# Allegro board codec_board_gnd_update.brd
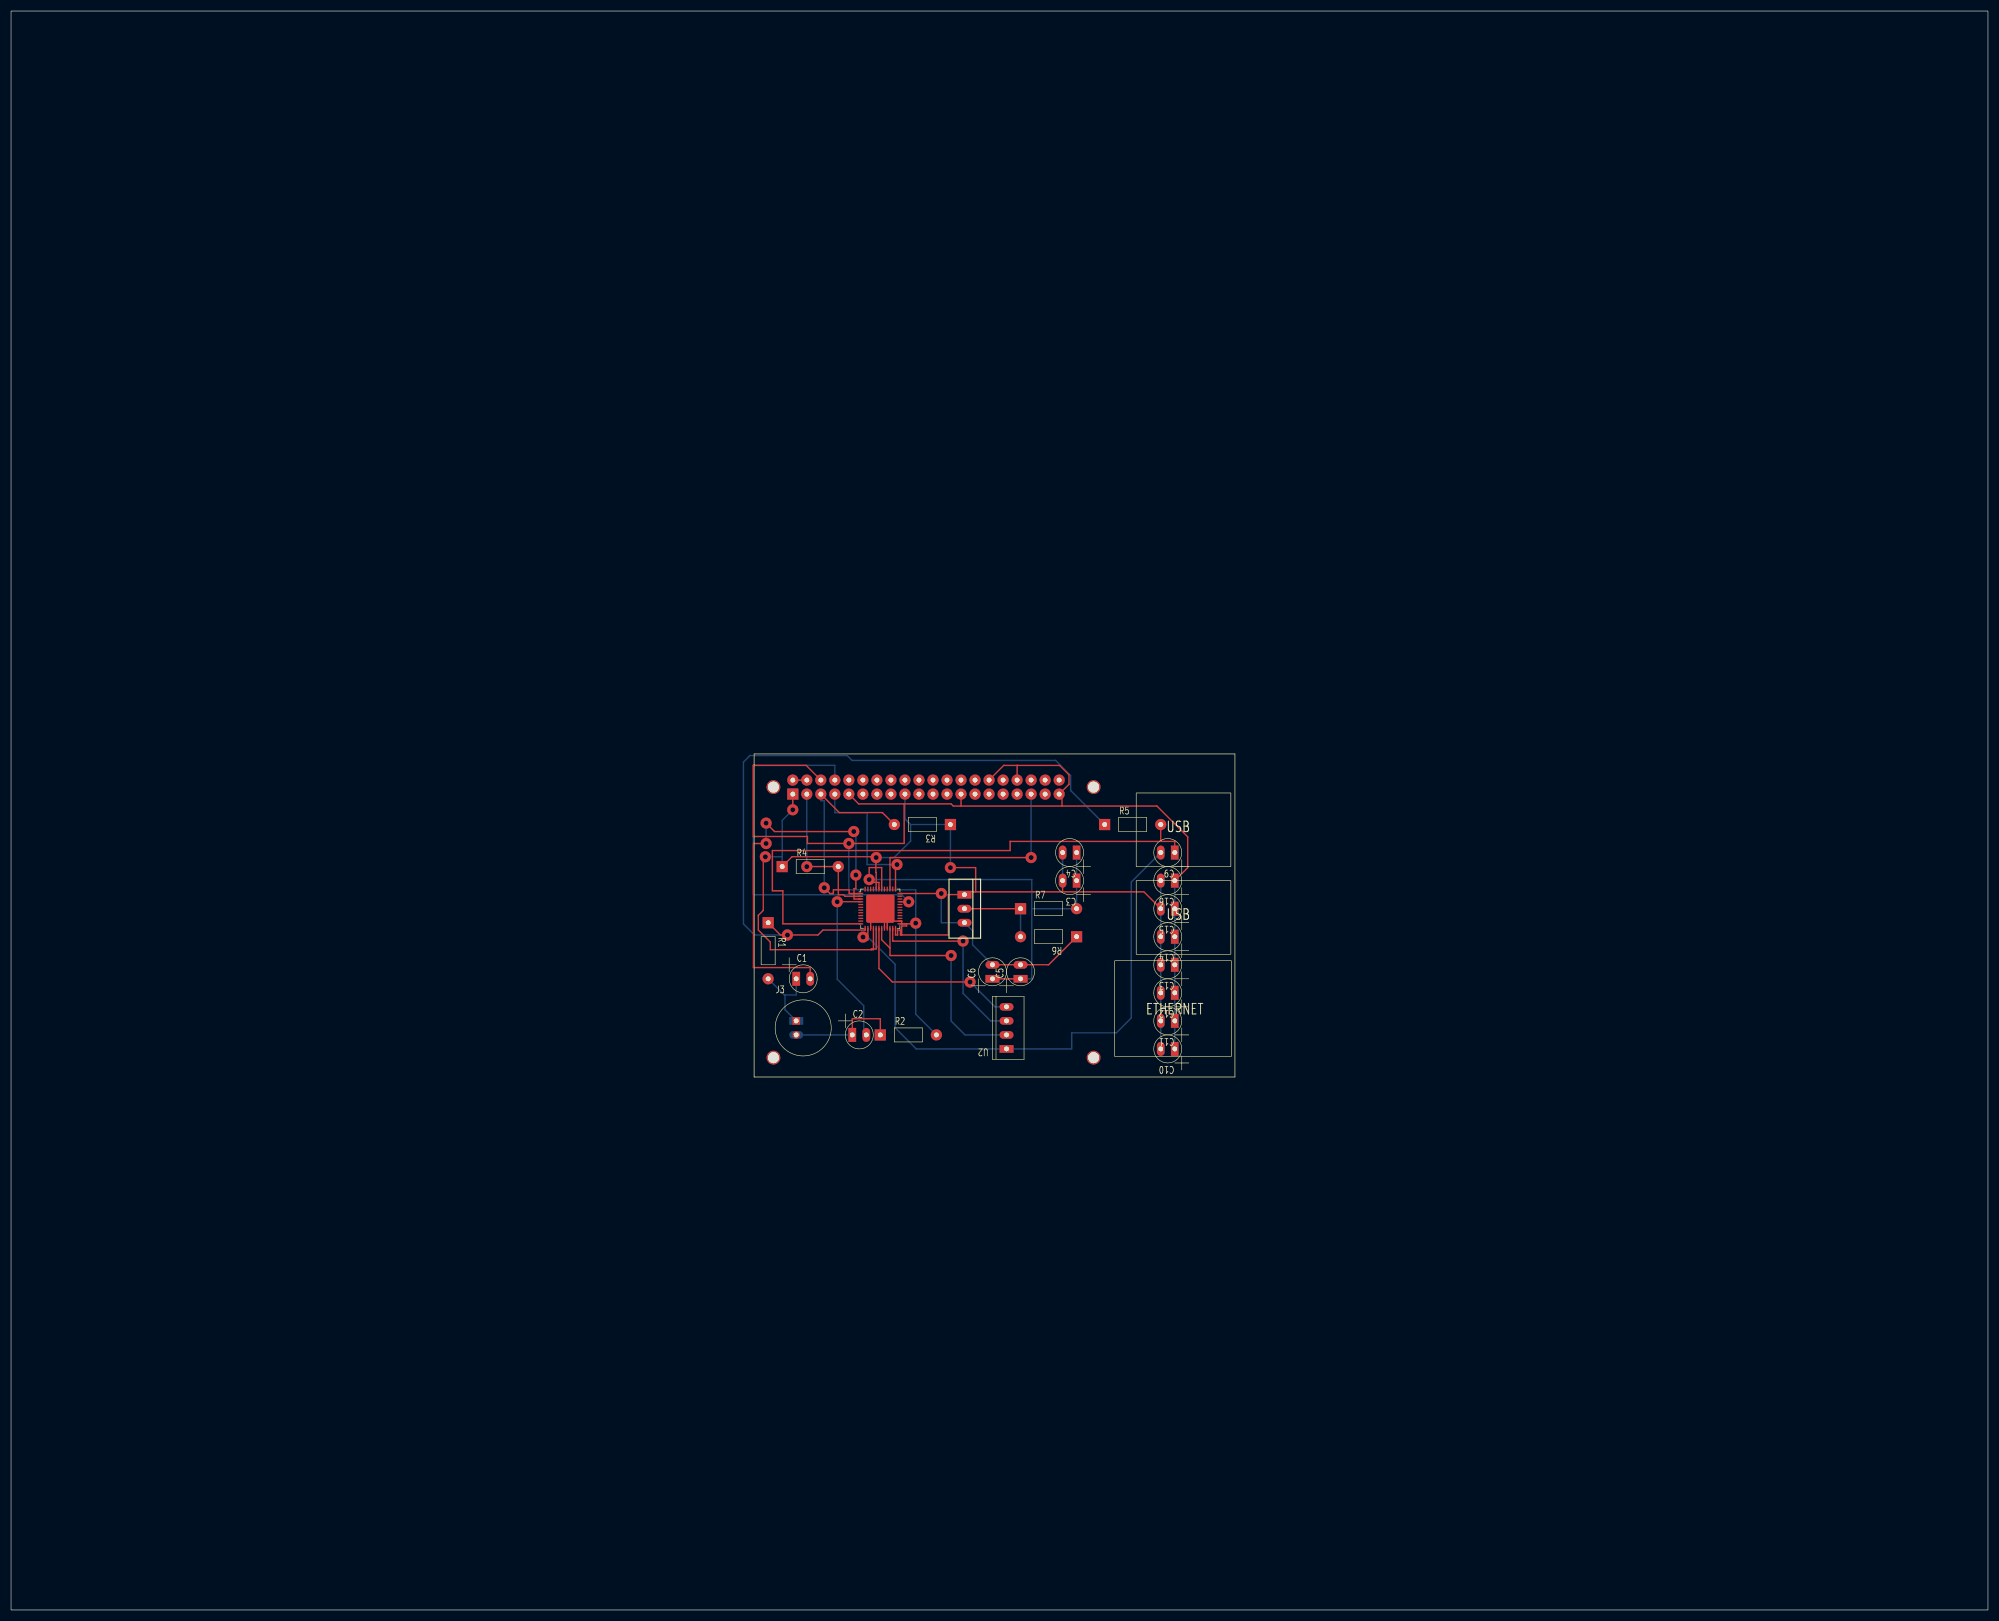
[diagram p0: board, top side]
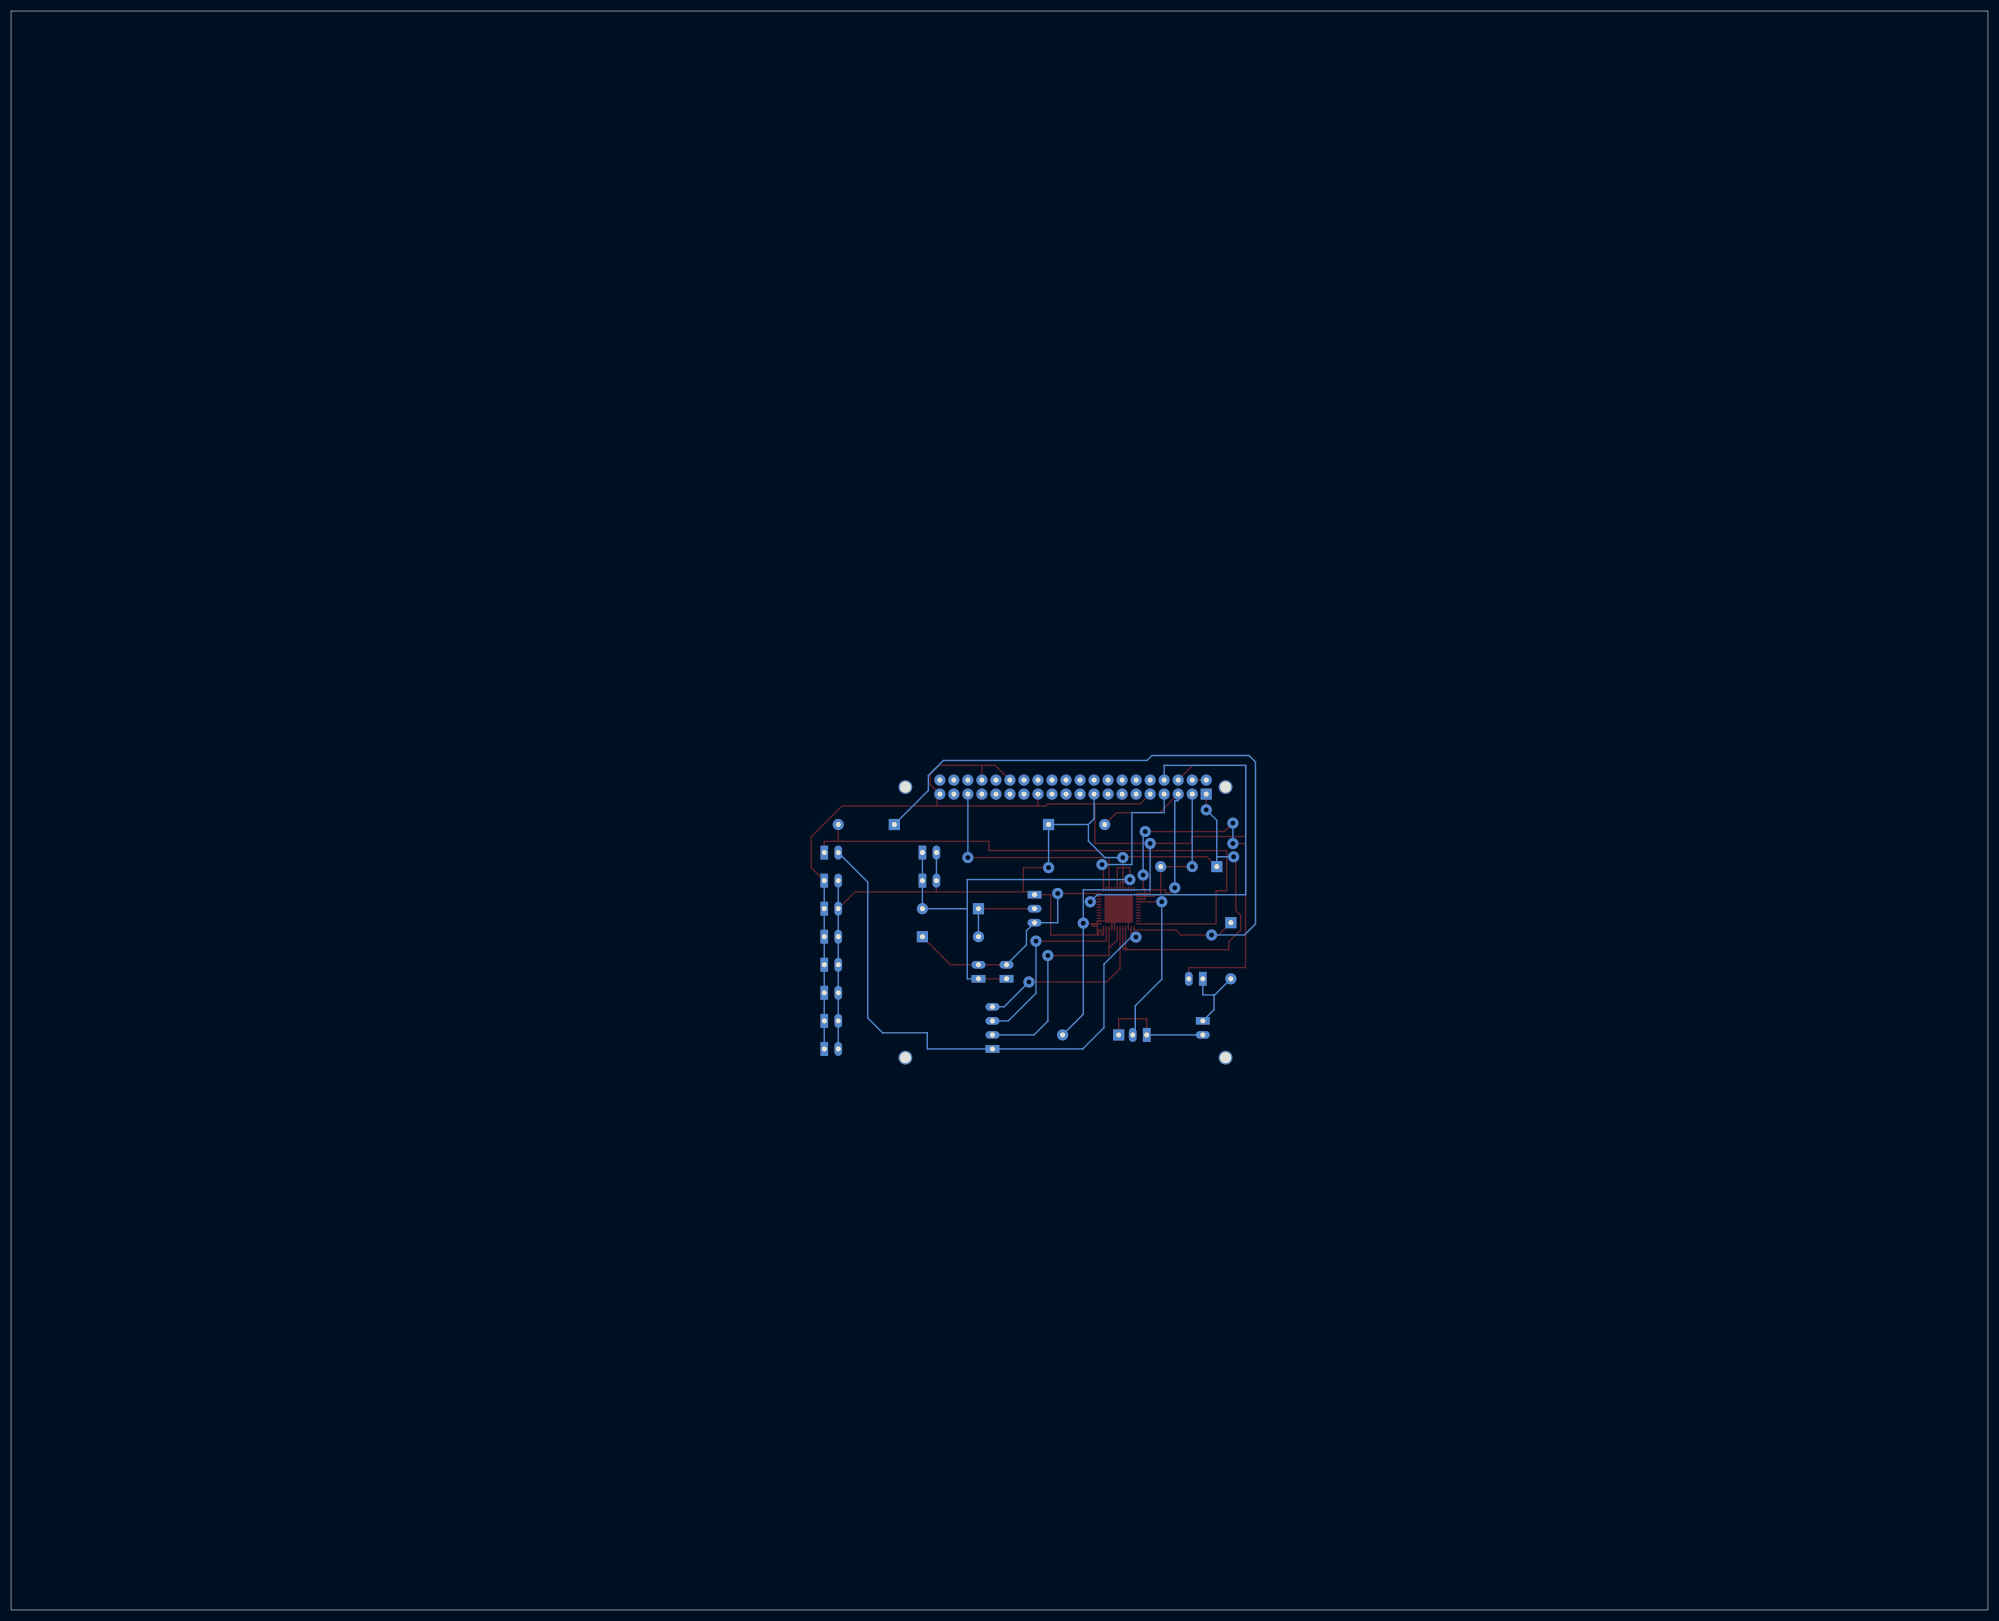
[diagram p1: board, bottom side, seen from below]

Outline 358.14 x 289.56 mm; copper layers: TOP, BOTTOM. Coordinates in mm from the lower left corner of the outline.
Outline path: rectangle 0,0 358.14,289.56

## Design rules (mm)
constraint set DEFAULT: min track width 0.254

## Placement (name value [footprint] x y rotation side)
C1  0.47uF  [GU-CAPCYL100]  142.24 114.3 0 top
C2  0.47uF  [GU-CAPCYL100]  152.4 104.14 0 top
C3  1uF  [GU-CAPCYL100]  193.04 132.08 180 top
C4  1uF  [GU-CAPCYL100]  193.04 137.16 180 top
C5  1uF  [GU-CAPCYL100]  182.88 114.3 90 top
C6  1uF  [GU-CAPCYL100]  177.8 114.3 90 top
C9  0.47uF  [GU-CAPCYL100]  210.82 137.16 180 top
C10  1uF  [GU-CAPCYL100]  210.82 101.6 180 top
C11  1uF  [GU-CAPCYL100]  210.82 106.68 180 top
C12  1uF  [GU-CAPCYL100]  210.82 111.76 180 top
C13  1uF  [GU-CAPCYL100]  210.82 116.84 180 top
C14  1uF  [GU-CAPCYL100]  210.82 121.92 180 top
C15  1uF  [GU-CAPCYL100]  210.82 127 180 top
C16  1uF  [GU-CAPCYL100]  210.82 132.08 180 top
J1  TLV320AIC33  [QFN49P50_700X700X100L40X24T515]  157.48 127 270 top
J3  Mic  [GU-MIC100]  142.24 106.68 0 top
R1  1k  [GU-RC400]  137.16 124.46 270 top
R2  1k  [GU-RC400]  157.48 104.14 0 top
R3  10k  [GU-RC400]  170.18 142.24 180 top
R4  10k  [GU-RC400]  139.7 134.62 0 top
R5  2k  [GU-RC400]  198.12 142.24 0 top
R6  1k  [GU-RC400]  193.04 121.92 180 top
R7  1k  [GU-RC400]  182.88 127 0 top
U1  Raspberry Pi B+  [GU-RASP-PI-3]  134.62 96.52 0 top
U2  Aux Out  [GU-MOLEX4]  180.34 101.6 180 top
U4  LM317_H  [GU-TO220AB]  172.72 129.54 270 top

## Library data of the parts
C1-C6 C9-C16 = CAP NP
J1 = CON50A_2
J3 = CON2
R1-R7 = RESISTOR
U1 = Raspberry Pi B+_0
U2 = 2MMCONN4
U4 = LM317_H

## Footprints (pads in the part's own frame, mm; a bottom-side part is the same pattern mirrored in y, then rotated)
GU-CAPCYL100
  rect 1.397x2.54 hole 0.889: 1(0,0)
  oval 1.397x2.54 hole 0.889: 2(2.54,0)
GU-MIC100
  rect 1.397x1.397 hole 0.889: 1(0,0)
  round 1.397 hole 0.889: 2(0,-2.54)
GU-MOLEX4
  rect 2.54x1.397 hole 0.889: 1(0,0)
  oval 2.54x1.397 hole 0.889: 2(0,-2.54) 3(0,-5.08) 4(0,-7.62)
GU-RASP-PI-3
  round 2.5 hole 2 unplated: (3.5,52.5) (3.5,3.5) (61.5,52.5) (61.5,3.5)
  rect 2.032x2.032 hole 0.889: 1(7,51.23)
  round 2.032 hole 0.889: 2(7,53.77) 3(9.54,51.23) 4(9.54,53.77) 5(12.08,51.23) 6(12.08,53.77) 7(14.62,51.23) 8(14.62,53.77) 9(17.16,51.23) 10(17.16,53.77) 11(19.7,51.23) 12(19.7,53.77) 13(22.24,51.23) 14(22.24,53.77) 15(24.78,51.23) 16(24.78,53.77) 17(27.32,51.23) 18(27.32,53.77) 19(29.86,51.23) 20(29.86,53.77) 21(32.4,51.23) 22(32.4,53.77) 23(34.94,51.23) 24(34.94,53.77) 25(37.48,51.23) 26(37.48,53.77) 27(40.02,51.23) 28(40.02,53.77) 29(42.56,51.23) 30(42.56,53.77) 31(45.1,51.23) 32(45.1,53.77) 33(47.64,51.23) 34(47.64,53.77) 35(50.18,51.23) 36(50.18,53.77) 37(52.72,51.23) 38(52.72,53.77) 39(55.26,51.23) 40(55.26,53.77)
GU-RC400
  rect 2.032x2.032 hole 0.889: 1(0,0)
  round 2.032 hole 0.889: 2(10.16,0)
GU-TO220AB
  rect 1.397x2.54 hole 0.889: 1(0,0)
  oval 1.397x2.54 hole 0.889: 2(2.54,0) 3(5.08,0)
QFN49P50_700X700X100L40X24T515
  rrect 0.24x0.9 smd: 1(-2.75,-3.55) 2(-2.25,-3.55) 3(-1.75,-3.55) 4(-1.25,-3.55) 5(-0.75,-3.55) 6(-0.25,-3.55) 7(0.25,-3.55) 8(0.75,-3.55) 9(1.25,-3.55) 10(1.75,-3.55) 11(2.25,-3.55) 12(2.75,-3.55) 25(2.75,3.55) 26(2.25,3.55) 27(1.75,3.55) 28(1.25,3.55) 29(0.75,3.55) 30(0.25,3.55) 31(-0.25,3.55) 32(-0.75,3.55) 33(-1.25,3.55) 34(-1.75,3.55) 35(-2.25,3.55) 36(-2.75,3.55)
  rrect 0.9x0.24 smd: 13(3.55,-2.75) 14(3.55,-2.25) 15(3.55,-1.75) 16(3.55,-1.25) 17(3.55,-0.75) 18(3.55,-0.25) 19(3.55,0.25) 20(3.55,0.75) 21(3.55,1.25) 22(3.55,1.75) 23(3.55,2.25) 24(3.55,2.75) 37(-3.55,2.75) 38(-3.55,2.25) 39(-3.55,1.75) 40(-3.55,1.25) 41(-3.55,0.75) 42(-3.55,0.25) 43(-3.55,-0.25) 44(-3.55,-0.75) 45(-3.55,-1.25) 46(-3.55,-1.75) 47(-3.55,-2.25) 48(-3.55,-2.75)
  rrect 5.15x5.15 smd: 49(0,0)

## Nets
1.9V: C5.2 C6.2 J1.36 R6.1 U4.3(OUT)
3V3: C3.2 C4.2 C10.2 C11.2 C12.2 C13.2 C14.2 C15.2 C16.2 J1.16 J1.17 J1.24 J1.25 J1.44 R3.1 R4.1 U1.1 U1.17 U4.1
5V: U1.2 U1.4(P5V#4)
AGND: C10.1 C11.1 C12.1 C13.1 C14.1 C15.1 C16.1 J1.15 J1.20 J1.21 J1.26 J1.49 R2.2 U1.6 U1.9 U1.14 U1.20 U1.25 U1.30 U1.34 U1.39
DGND: C3.1 C4.1 C5.1 C6.1 J1.42 J1.43 R7.2
/RESET: J1.33 U1.8
BCLK: J1.38 U1.12
DIN: J1.40 U1.38
DOUT: J1.41 U1.40
HPCOM: J1.19 J1.22 U2.2
HPLOUT: J1.18 U2.4
HPROUT: J1.23 U2.3
LINE1LM: C2.2 J1.4
LINE1LP: C1.2 J1.3
MCLK: J1.37 U1.7
MIC3R: C9.2 J1.14 U2.1
MICBIAS: J1.13 R1.1 R5.1
MICDET: C9.1 J1.12 R5.2
SCL: J1.1 R3.2 U1.5
SDA: J1.2 R4.2 U1.3
WCLK: J1.39 U1.35
N00434: C1.1 J3.1 R1.2
N00441: C2.1 J3.2 R2.1
N13170: R6.2 R7.1 U4.2

Pads without a net: J1 5 6 7 8 9 10 11 27 28 29 30 31 32 34 35 45 46 47 48; U1 10 11 13 15 16 18 19 21 22 23 24 26 27 28 29 31 32 33 36 37

## Via types
v1: diameter 2.032, hole 0.889, TOP to BOTTOM, 23 vias

## Routing (per net, layer and track width the routed paths; a pad name or vN(x,y) marks a point on that pad's centre or on a via; arc(x,y) is an arc through that point)
1.9V: length 44
  TOP w0.254: v1(168.53,129.75) J1.36 ; C6.2 C5.2 187.96,116.84 R6.1
  BOTTOM w0.254: C6.2 174.19,120.45 174.19,122.99 U4.3 168.53,124.46 v1(168.53,129.75)
3V3: length 228.1
  TOP w0.254: J1.24 160.23,122.24 160.61,122.24 160.61,123.13 161.12,123.13 161.12,122.24 161.35,122.24 ; J1.44 156.73,133.54 156.67,133.54 156.67,135.32 156.73,135.32 v1(156.73,136.26) 156.59,136.4 141.48,136.4 R4.1 ; C15.2 205.23,130.05 190.5,130.05 ; 161.35,122.24 161.35,123.87 162.24,123.87 162.24,124.25 J1.25 ; 161.35,122.24 169.8,122.24 169.8,129.54 U4.1 173.23,130.05 174.75,130.05 ; v1(136.65,136.4) 136.27,136.02 136.27,126.68 135.38,125.79 135.38,123.13 137.54,120.97 137.54,119.57 155.84,119.57 ; J1.16 156.23,119.57 155.84,119.57 ; 174.75,130.05 174.75,134.43 v1(170.18,134.43) ; 174.75,130.05 190.5,130.05 ; 155.84,119.57 155.84,119.7 156.73,119.7 J1.17 ; 190.5,130.05 C3.2 ; U1.1 v1(141.62,144.91)
  BOTTOM w0.254: 162.97,142.24 162.97,139.25 159.98,136.26 v1(156.73,136.26) ; 162.97,142.24 161.94,143.27 U1.17 ; 162.97,142.24 R3.1 v1(170.18,134.43) ; 139.7,136.4 139.7,142.99 v1(141.62,144.91) ; 139.7,136.4 v1(136.65,136.4) ; 139.7,136.4 R4.1 ; C4.2 C3.2 ; C16.2 C15.2 C14.2 C13.2 C12.2 C11.2 C10.2
5V: length 2.5
  TOP w0.254: U1.2 U1.4
AGND: length 257.7
  TOP w0.254: v1(163.89,124.38) 163.89,124.25 161.35,124.25 161.35,124.75 J1.26 158.73,124.75 ; C16.1 213.17,134.43 213.17,140.01 207.59,145.59 190.39,145.59 ; U1.9 153.56,145.97 161.8,145.97 ; 182.26,152.96 189.94,152.96 191.66,151.24 191.66,149.53 U1.39 190.39,147.24 190.39,145.59 ; 182.26,152.96 U1.34 ; 182.26,152.96 179.85,152.96 U1.30 ; 172.1,145.59 170.7,145.59 170.32,145.97 161.8,145.97 ; 172.1,145.59 U1.25 ; 172.1,145.59 190.39,145.59 ; 158.23,124.75 158.23,126.25 J1.49 155.73,125.25 J1.15 ; 158.23,124.75 J1.20 ; 158.23,124.75 158.73,124.75 ; 161.8,145.97 161.8,138.81 v1(151.78,138.81) 144.28,138.81 144.28,140.07 134.47,140.07 134.47,152.96 144.03,152.96 U1.6 ; 158.73,124.75 J1.21
  BOTTOM w0.254: C16.1 C15.1 C14.1 C13.1 C12.1 C11.1 C10.1 ; R2.2 163.89,107.89 v1(163.89,124.38) 163.89,130.41 151.78,130.41 v1(151.78,138.81)
DGND: length 84.6
  TOP w0.254: J1.43 157.23,131.76 155.46,131.76 v1(155.46,132.27) 155.46,134.43 157.73,134.43 J1.42 ; C6.1 C5.1
  BOTTOM w0.254: 184.91,127 184.91,114.3 C5.1 ; 184.91,127 184.91,132.27 v1(155.46,132.27) ; 184.91,127 R7.2 C3.1 C4.1
/RESET: length 71.1
  TOP w0.254: v1(162.62,128.25) J1.33
  BOTTOM w0.254: U1.8 149.24,152.96 134.47,152.96 134.47,129.52 161.35,129.52 v1(162.62,128.25)
HPCOM: length 43.2
  TOP w0.254: 159.23,119.86 157.73,121.36 J1.19 ; 159.23,119.86 159.23,118.52 v1(170.31,118.52) ; 159.23,119.86 J1.22
  BOTTOM w0.254: U2.2 172.82,104.14 170.31,106.65 v1(170.31,118.52)
HPLOUT: length 33.3
  TOP w0.254: J1.18 157.23,116.16 159.66,113.73 v1(173.74,113.73)
  BOTTOM w0.254: v1(173.74,113.73) 178.24,109.22 U2.4
HPROUT: length 34.5
  TOP w0.254: v1(172.47,121.13) 159.73,121.13 J1.23
  BOTTOM w0.254: v1(172.47,121.13) 172.47,111.67 177.45,106.68 U2.3
LINE1LM: length 30.6
  TOP w0.254: J1.4 v1(149.67,128.25)
  BOTTOM w0.254: v1(149.67,128.25) 149.67,114.22 154.47,109.42 154.47,104.61 C2.2
LINE1LP: length 71.2
  TOP w0.254: J1.3 152.72,128.75 152.72,130.64 153.05,130.64 v1(153.05,133.09) ; v1(136.79,138.8) 134.49,138.8 134.49,116.33 144.78,116.33 C1.2 ; v1(136.79,142.49) 138.31,140.97 v1(152.67,140.97)
  BOTTOM w0.254: v1(153.05,133.09) 153.05,140.59 v1(152.67,140.97) ; v1(136.79,142.49) v1(136.79,138.8)
MCLK: length 28.6
  TOP w0.254: J1.37 160.23,134.72 v1(160.5,134.99)
  BOTTOM w0.254: U1.7 149.24,144.4 155.08,144.4 155.08,134.99 v1(160.5,134.99)
MIC3R: length 103.4
  TOP w0.254: v1(154.35,121.86) 154.73,121.86 154.73,121.35 155.23,121.35 J1.14
  BOTTOM w0.254: v1(154.35,121.86) 155.23,121.86 160.15,116.94 160.15,105.44 163.98,101.6 U2.1 192.15,101.6 192.15,104.52 200.25,104.52 202.95,107.22 202.95,131.83 C9.2
MICBIAS: length 130
  TOP w0.254: R1.1 139.38,122.24 v1(140.65,122.24) 146.19,122.24 147.08,123.13 154.73,123.13 J1.13
  BOTTOM w0.254: v1(140.65,122.24) 134.68,122.24 132.69,124.23 132.69,153.56 133.86,154.74 151.46,154.74 152.35,153.85 189.24,153.85 191.96,151.12 191.96,148.4 R5.1
MICDET: length 108.9
  TOP w0.254: R5.2 208.28,139.19 ; 208.28,139.19 180.99,139.19 180.99,137.53 137.92,137.53 137.92,130.24 139.83,130.24 139.83,124.25 J1.12 ; 208.28,139.19 210.82,139.19 C9.1
SCL: length 41.5
  TOP w0.254: R3.2 157.86,144.4 150.05,144.4 U1.5 ; v1(147.32,130.79) 148.36,129.75 148.97,129.75 148.97,130.41 151.83,130.41 151.83,129.75 J1.1
  BOTTOM w0.254: v1(147.32,130.79) 147.32,146.56 146.7,146.56 U1.5
SDA: length 28.1
  TOP w0.254: J1.2 151.08,129.25 150.81,129.52 149.86,129.52 R4.2 v1(144.16,134.62)
  BOTTOM w0.254: U1.3 v1(144.16,134.62)
WCLK: length 42.8
  TOP w0.254: v1(184.8,136.26) 159.23,136.26 J1.39
  BOTTOM w0.254: U1.35 v1(184.8,136.26)
N00434: length 14.8
  BOTTOM w0.254: 140.21,111.38 142.24,111.38 C1.1 ; 140.21,111.38 140.08,111.38 R1.2 ; 140.21,111.38 140.21,108.71 J3.1
N00441: length 21.1
  TOP w0.254: R2.1 157.48,107.06 152.4,107.06 C2.1
  BOTTOM w0.254: J3.2 C2.1
N13170: length 15.2
  TOP w0.254: U4.2 R7.1
  BOTTOM w0.254: R6.2 R7.1
